# EAGLE board RoverPower (EAGLE 6.4)
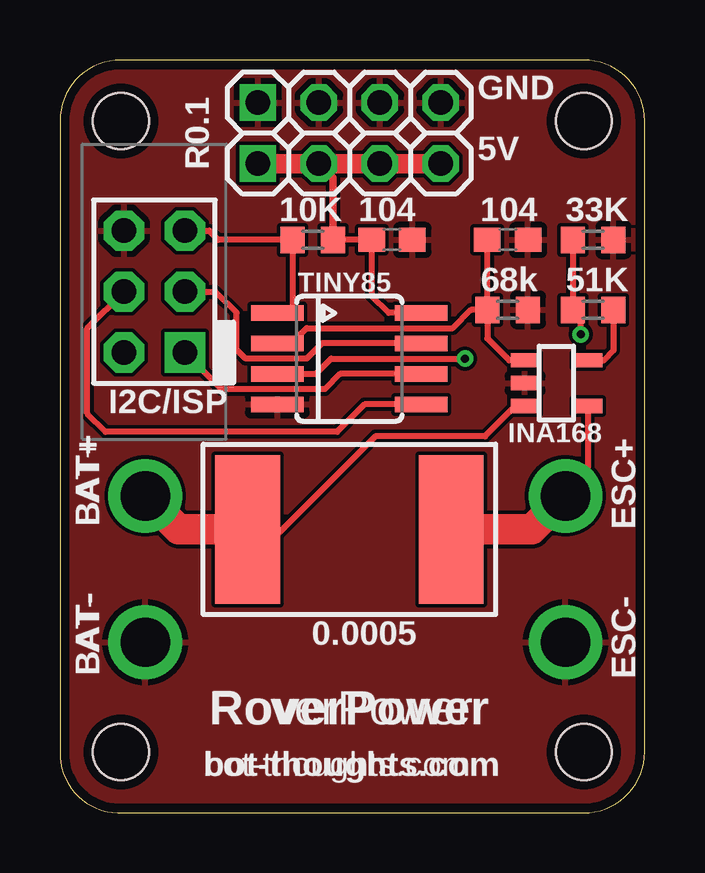
[diagram p0: board, top side]
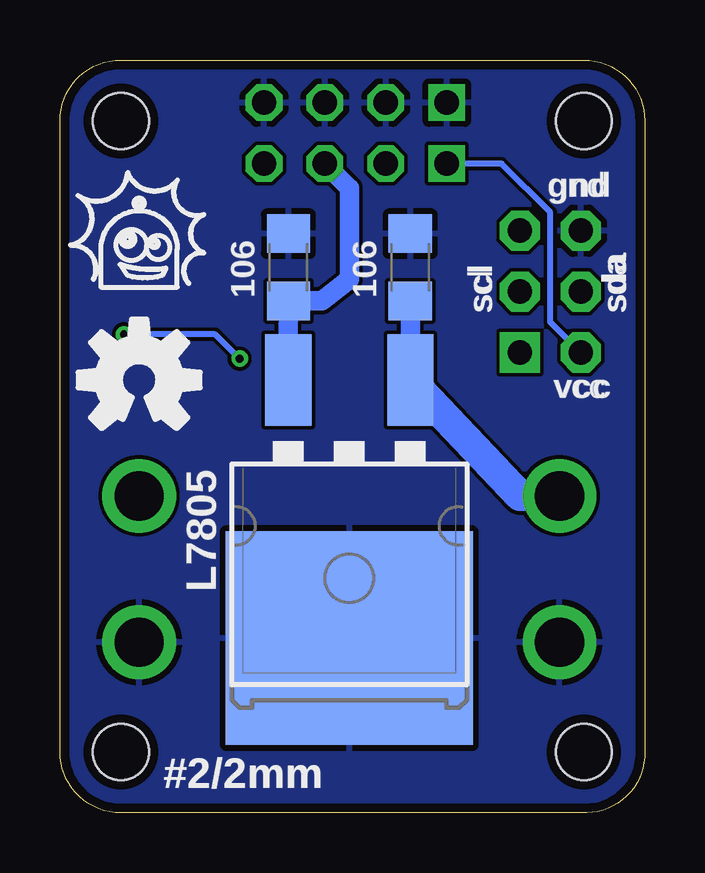
[diagram p1: board, bottom side, seen from below]

Size 24.38 x 31.37 mm. Coordinates in mm from the lower left corner, seen from the top.
Outline: 0,28.83 0,2.54 arc90 2.41,0 21.84,0 arc90 24.38,2.54 24.38,28.83 arc90 21.84,31.37 2.54,31.37 arc90 0,28.83
Copper layers (1*16): Top 0.0356mm / dielectric 1.5011mm / Bottom 0.0356mm
Design rules "LaenPCBOrder": minimum track width 6mil, minimum drill 13mil, track to track 6mil, track to pad 6mil, pad to pad 6mil, via to via 6mil, smd to smd 6mil, copper to edge 15mil, drill to drill 6mil, minimum pad ring 7mil, minimum via ring 7mil, stop-mask expansion 4mil, vias tented up to drill 20mil, thermal gap 10mil
Holes 2.34 mm at 2.54,28.83 21.84,28.83 2.54,2.54 21.84,2.54

## Footprints (pad centres in the part's own frame; a part is rotated, then mirrored left to right if it is on the bottom)
PAD_12GA = drill 2.056: P$1 0,0
C1206 = smd 1.6 x 1.8: 1 -1.4,0; 2 1.4,0
C0603 = smd 1.1 x 1: 1 -0.85,0; 2 0.85,0
SOT23-5 = smd 0.6 x 1.2: 1 -0.95,-1.306; 2 0,-1.306; 3 0.95,-1.306; 4 0.95,1.306; 5 -0.95,1.306
SOIC8 = smd 0.66 x 2.2: 1 -1.905,-3; 2 -0.635,-3; 3 0.635,-3; 4 1.905,-3; 5 1.905,3; 6 0.635,3; 7 -0.635,3; 8 -1.905,3
CON6P2R = drill 1.016 pad 1.676 square: 1 -2.54,-1.27 | drill 1.016 pad 1.676 octagon: 2 -2.54,1.27; 3 0,-1.27; 4 0,1.27; 5 2.54,-1.27; 6 2.54,1.27
1X04-S = drill 1.016 square: 1 -3.81,0 | drill 1.016 octagon: 2 -1.27,0; 3 1.27,0; 4 3.81,0
R3921 = smd 2.692 x 6.198: P$1 -4.242,0; P$2 4.242,0
R0603 = smd 1 x 1.1: 1 -0.85,0; 2 0.85,0
D2PAK = smd 1.93 x 3.81: 1 -2.55,-8.25; 3 2.55,-8.25 | smd 10.3 x 8.9: 2 0,2.5

## Placement (x,y rotation side)
BAT+  WIREPAD_12GA  [PAD_12GA]  3.56,13.21 90 top
BAT-  WIREPAD_12GA  [PAD_12GA]  3.56,7.11 90 top
C1  106  [C1206]  9.78,22.73 90 bottom
C2  106  [C1206]  14.86,22.73 90 bottom
C3  104  [C0603]  18.67,23.88 0 top
C4  104  [C0603]  13.84,23.88 0 top
ESC+  WIREPAD_12GA  [PAD_12GA]  21.08,13.21 270 top
ESC-  WIREPAD_12GA  [PAD_12GA]  21.08,7.11 270 top
IC1  INA168  [SOT23-5]  20.7,17.91 270 top
IC3  TINY85  [SOIC8]  12.06,18.92 270 top
J1  I2C/ISP  [CON6P2R]  3.94,21.72 90 top
JP3  5V  [1X04-S]  12.06,27.05 0 top
JP4  GND  [1X04-S]  12.06,29.59 0 top
R1  0.0005  [R3921]  12.06,11.81 0 top
R2  68k  [R0603]  18.67,20.95 180 top
R3  51K  [R0603]  22.23,20.95 0 top
R4  33K  [R0603]  22.23,23.88 180 top
R5  10K  [R0603]  10.54,23.88 0 top
U2  L7805  [D2PAK]  12.32,9.78 180 bottom

## Library data of the parts
BAT+ BAT- ESC+ ESC- = bt_electromech
C1 C2 C4 R2 = rcl
C3 R3-R5 = resistor
IC1 = burr-brown; MF: TEXAS INSTRUMENTS; MPN: INA168NA/250; OC_FARNELL: 4375737; OC_NEWARK: 35C1744
IC3 J1 = bt_avr
JP3 JP4 = pinhead-2
R1 = bt; PARTNO: WSLP3921L5000FEB; POWER: 6W+
U2 = v-reg-3

## Nets
5V: C2.1 C4.1 IC3.8 J1.2 JP3.1 JP3.2 JP3.3 JP3.4 R5.2 U2.3
!RESET: IC3.1 J1.5 R5.1
AMP: C3.1 IC1.1 IC3.2 R2.2
BAT_V: BAT+.P$1 C1.1 IC1.3 R1.P$1 U2.1
ESC_V: ESC+.P$1 IC1.4 R1.P$2
GND: BAT-.P$1 C1.2 C2.2 C3.2 C4.2 ESC-.P$1 IC1.2 IC3.4 J1.6 JP4.1 JP4.2 JP4.3 JP4.4 R2.1 R4.1 U2.2
MISO: IC3.6 J1.1
SCL: IC3.7 J1.3
SDA: IC3.5 J1.4
V+: IC1.5 R3.2
VOLT: IC3.3 R3.1 R4.2

## Tracks (layer width: path | path; a pad name or v marks a point on that pad's centre or on a via)
5V
  Top 0.254: R5.2 C4.1 12.99,21.55 13.72,20.83 IC3.8
  Top 0.305: R5.2 11.39,26.45 JP3.2
  Top 0.813: JP3.1 JP3.2 JP3.3 JP3.4
  Bottom 0.254: J1.2 3.94,20.45 3.94,25.02 5.97,27.05 JP3.1
  Bottom 0.813: U2.3 14.87,19.55 C2.1 13.46,21.33 12.32,22.23 12.32,26.04 JP3.3
!RESET
  Top 0.254: IC3.1 9.69,20.85 R5.1 6.6,23.88 6.22,24.26 J1.5
AMP
  Top 0.254: IC3.2 9.66,19.57 10.29,20.19 16.38,20.19 17.14,20.95 R2.2 | R2.2 C3.1 | IC1.1 18.73,18.86 17.82,19.77 R2.2
BAT_V
  Top 0.254: IC1.3 18.99,16.96 17.72,15.69 13.15,15.69 8.08,10.62 R1.P$1
  Top 1.27: BAT+.P$1 4.95,11.81 R1.P$1
  Bottom 0.813: U2.1 9.77,19.8 C1.1
  Bottom 1.27: U2.1 5.2,13.21 BAT+.P$1
ESC_V
  Top 0.254: IC1.4 22.01,14.39 ESC+.P$1
  Top 1.27: R1.P$2 19.68,11.81 ESC+.P$1
GND
  pour Top (rank 3): 24.38,28.83 24.38,2.54 arc-90 21.84,0 2.54,0 arc-90 0,2.54 0,28.83 arc-90 2.54,31.37 21.84,31.37 arc-90
  pour Bottom (rank 3): 24.38,28.83 24.38,2.54 arc-90 21.84,0 2.54,0 arc-90 0,2.54 0,28.83 arc-90 2.54,31.37 21.84,31.37 arc-90
MISO
  Top 0.254: IC3.6 11.68,18.29 11.05,17.65 6.73,17.65 J1.1
SCL
  Top 0.254: IC3.7 10.92,19.56 10.29,18.92 7.75,18.92 7.37,19.3 7.37,20.83 6.48,21.72 J1.3
SDA
  Top 0.254: IC3.5 12.7,17.02 11.56,15.88 1.91,15.88 1.14,16.64 1.14,20.19 J1.4
V+
  Top 0.254: R3.2 23.07,19.27 22.67,18.86 IC1.5
VOLT  (via drill 0.33)
  Top 0.254: R4.2 R3.1 21.72,20.61 v21.72,19.94 | IC3.3 10.68,18.3 11.3,18.92 v16.89,18.92
  Bottom 0.254: v16.89,18.92 17.91,19.94 v21.72,19.94

## Text on the board
bPlace: gnd | sda | scl | vcc
tNames: R0.1 | RoverPower | bot-thoughts.com
bNames: #2/2mm
tsilk: GND | R0.1 | 5V | 10K | 104 | 104 | 33K | TINY85 | 68k | 51K | I2C/ISP | INA168 | BAT+ | ESC+ | 0.0005 | BAT- | ESC- | RoverPower | bot-thoughts.com
bsilk: gnd | sda | scl | 106 | 106 | vcc | L7805 | #2/2mm